# Altium PCB PCB_TIA.PcbDoc
Units mm, origin at the board's own origin, x right, y up, seen from the top; angles counter-clockwise.
Board outline 53.1 x 40 mm, 4 copper layers (Top Layer, Layer 1, Layer 2, Bottom Layer), stack 1.586 mm thick; 14 components, 7 nets, 41 pads, 74 vias.
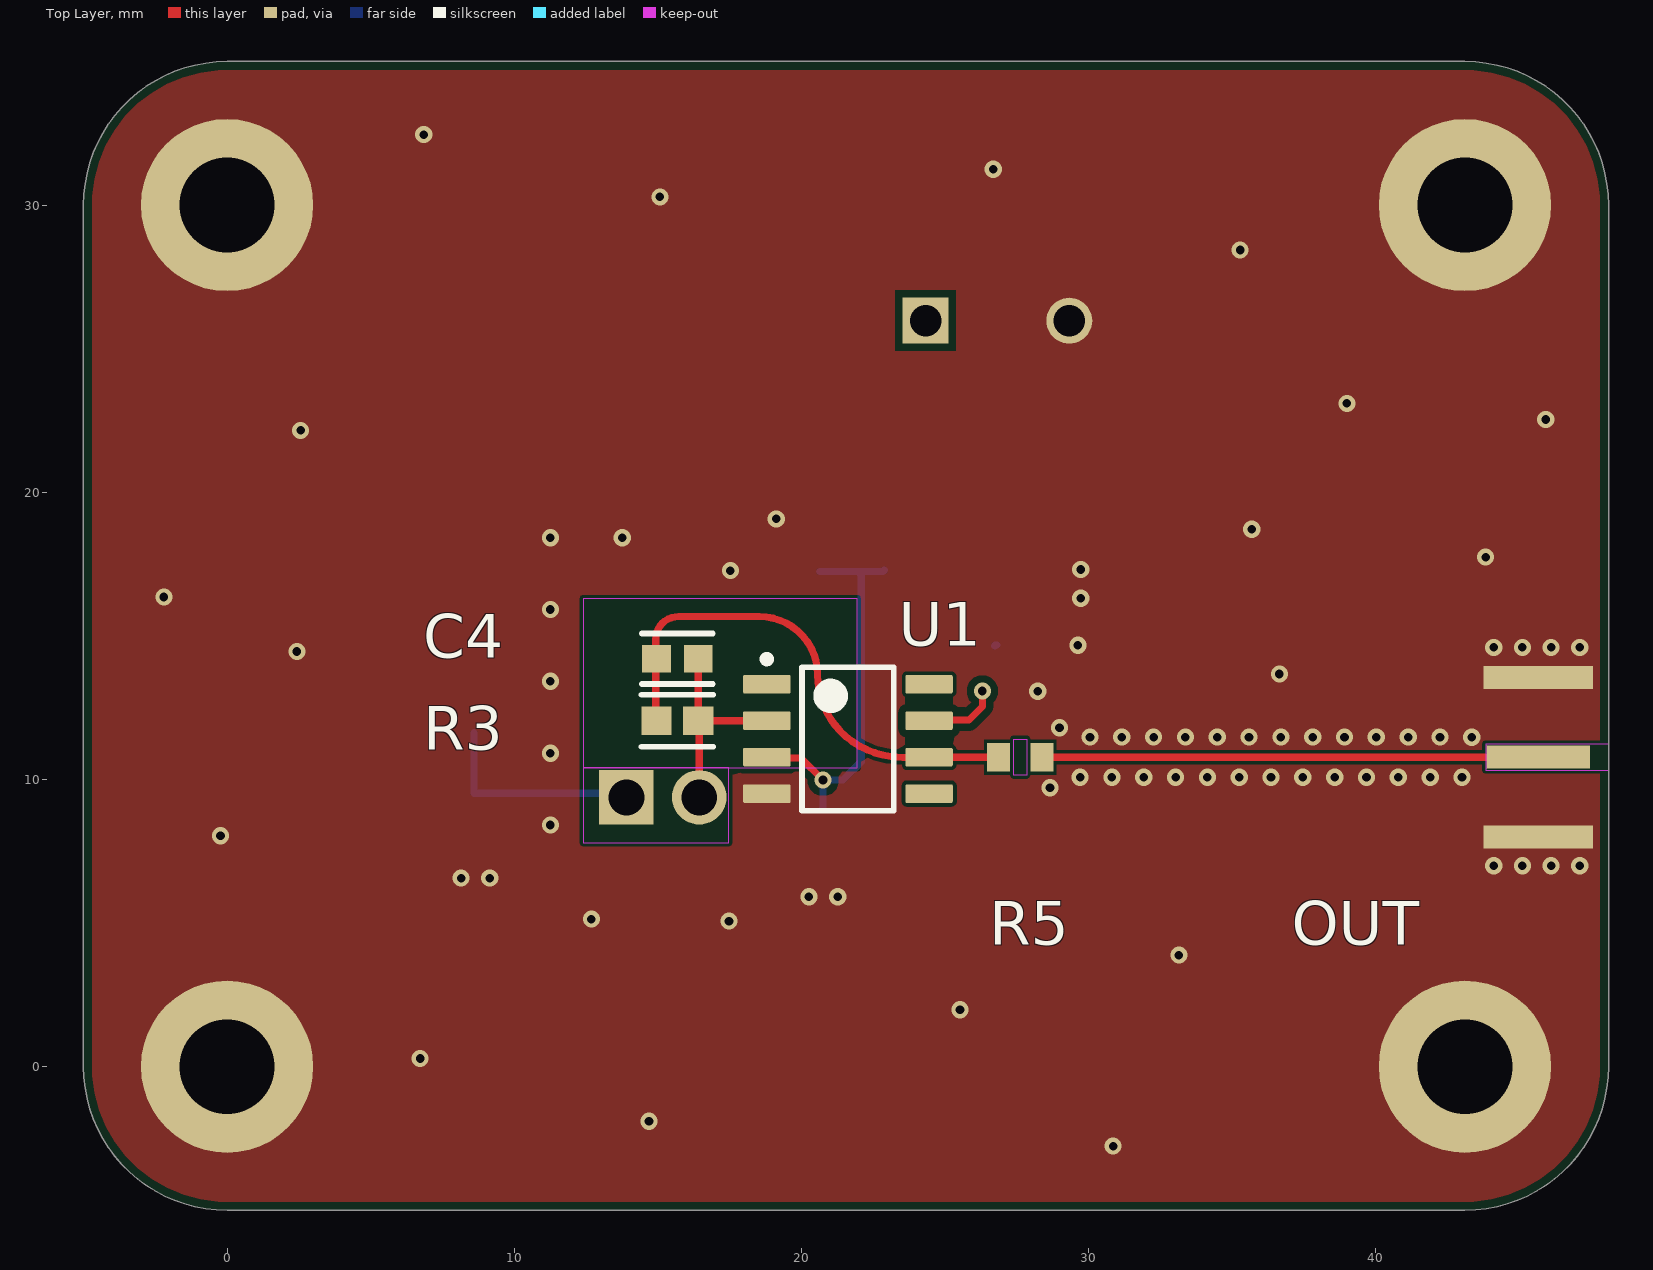
[diagram p0: Top Layer view]
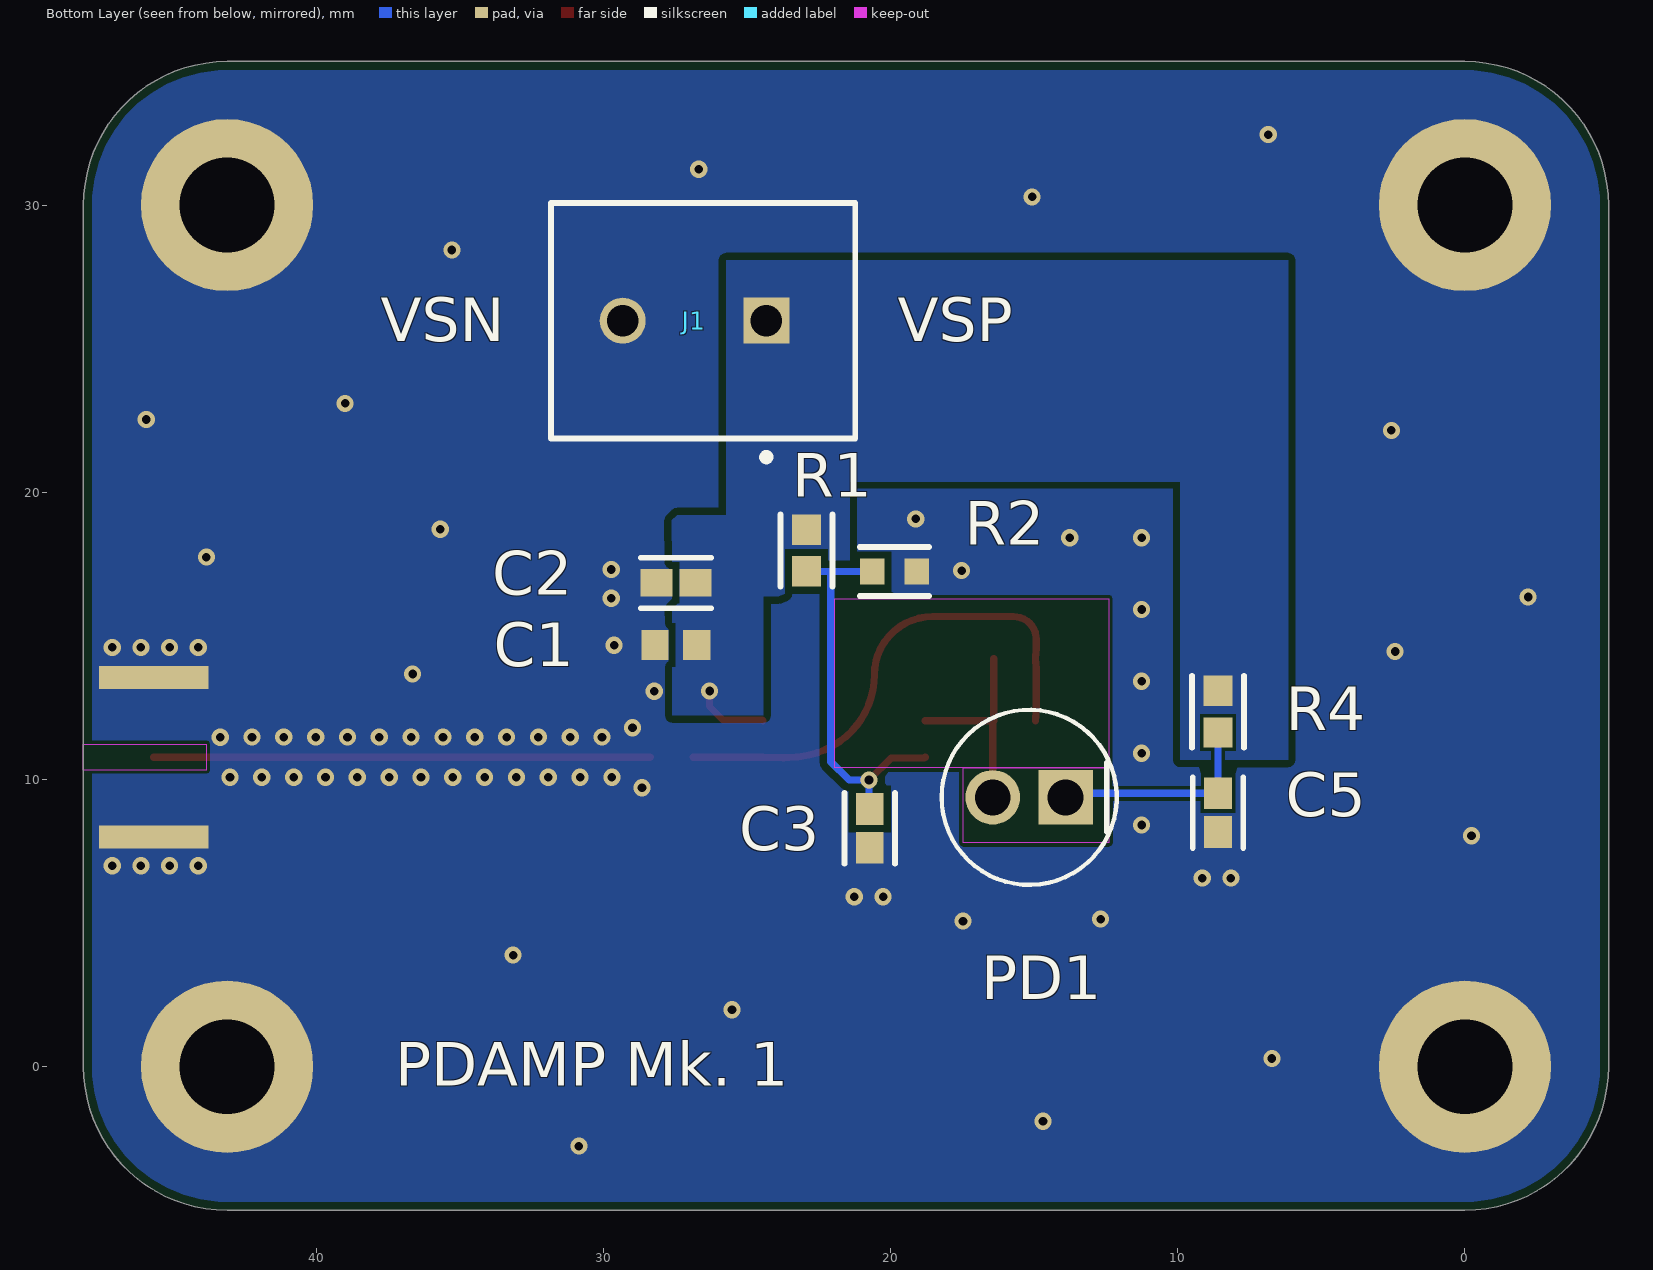
[diagram p1: Bottom Layer view, seen from below]
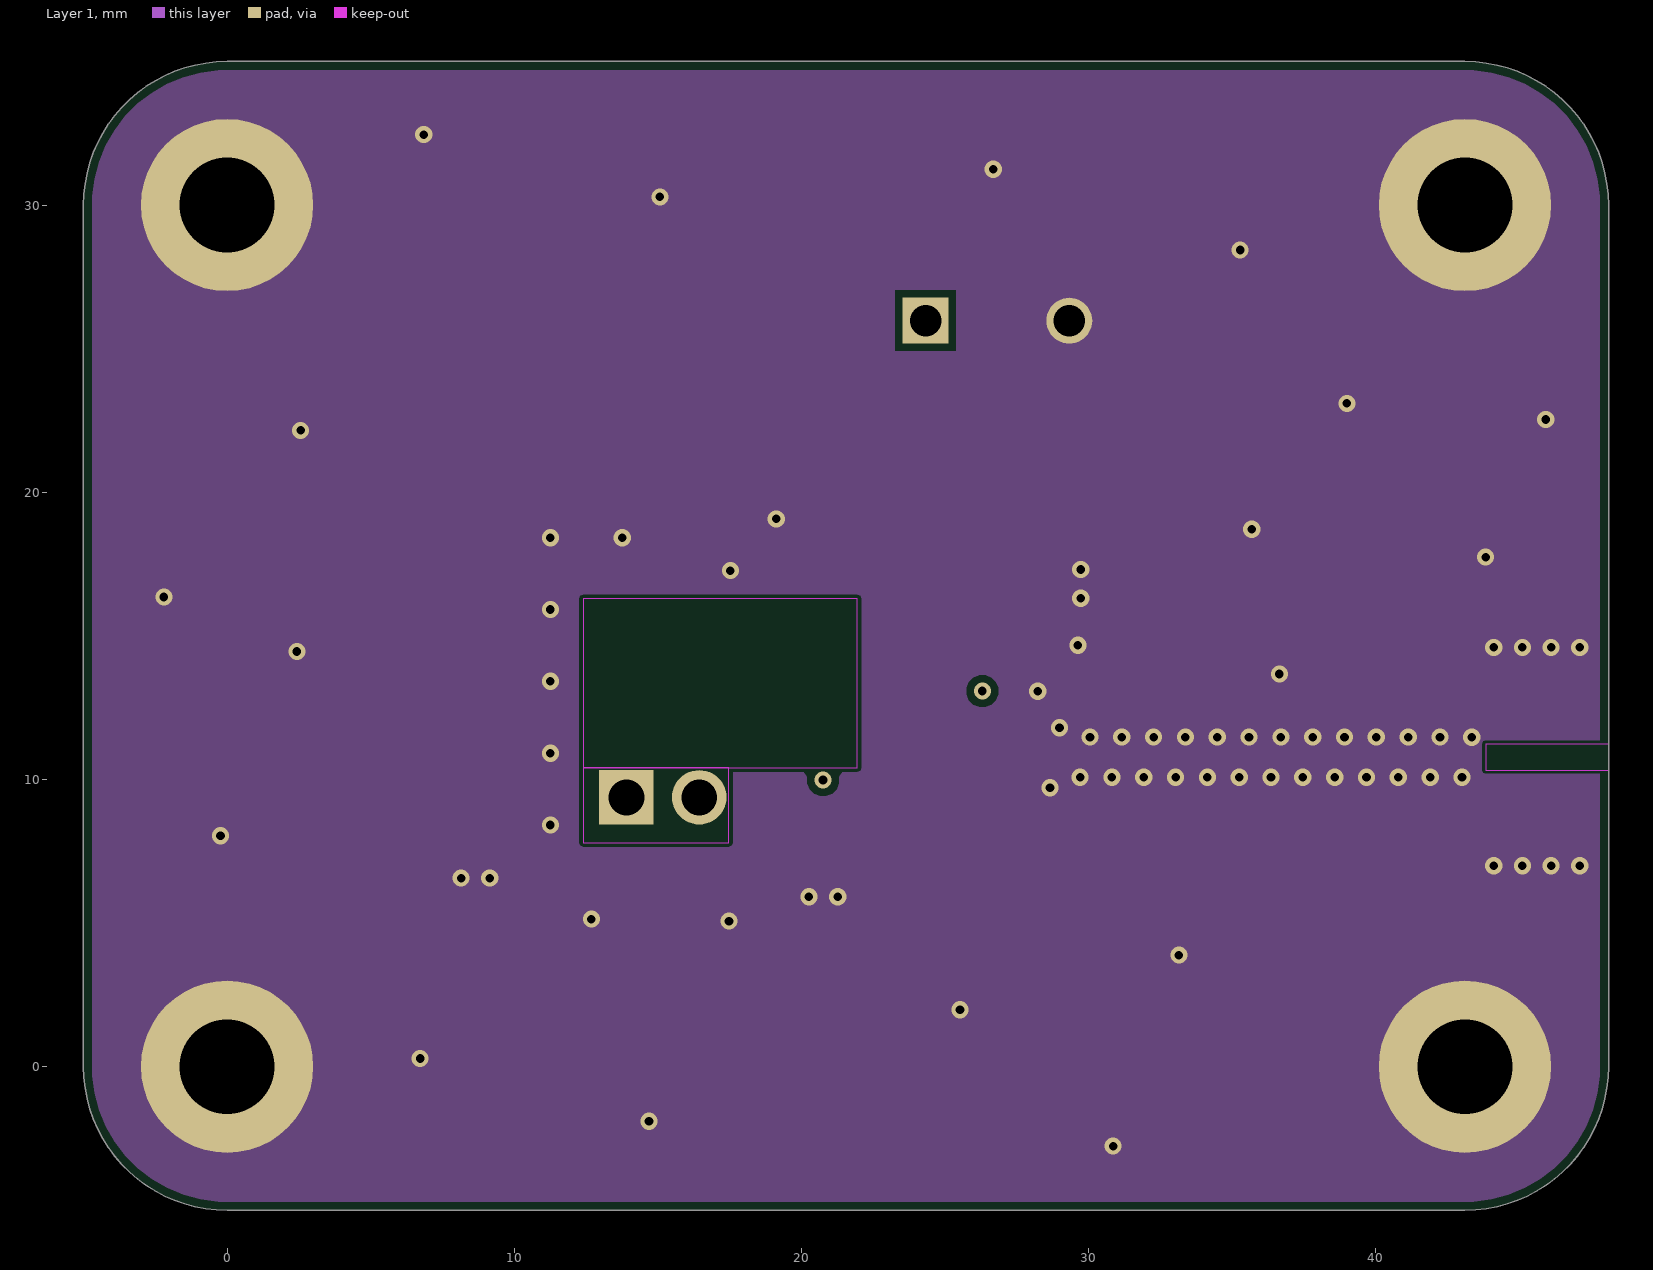
[diagram p2: Layer 1]
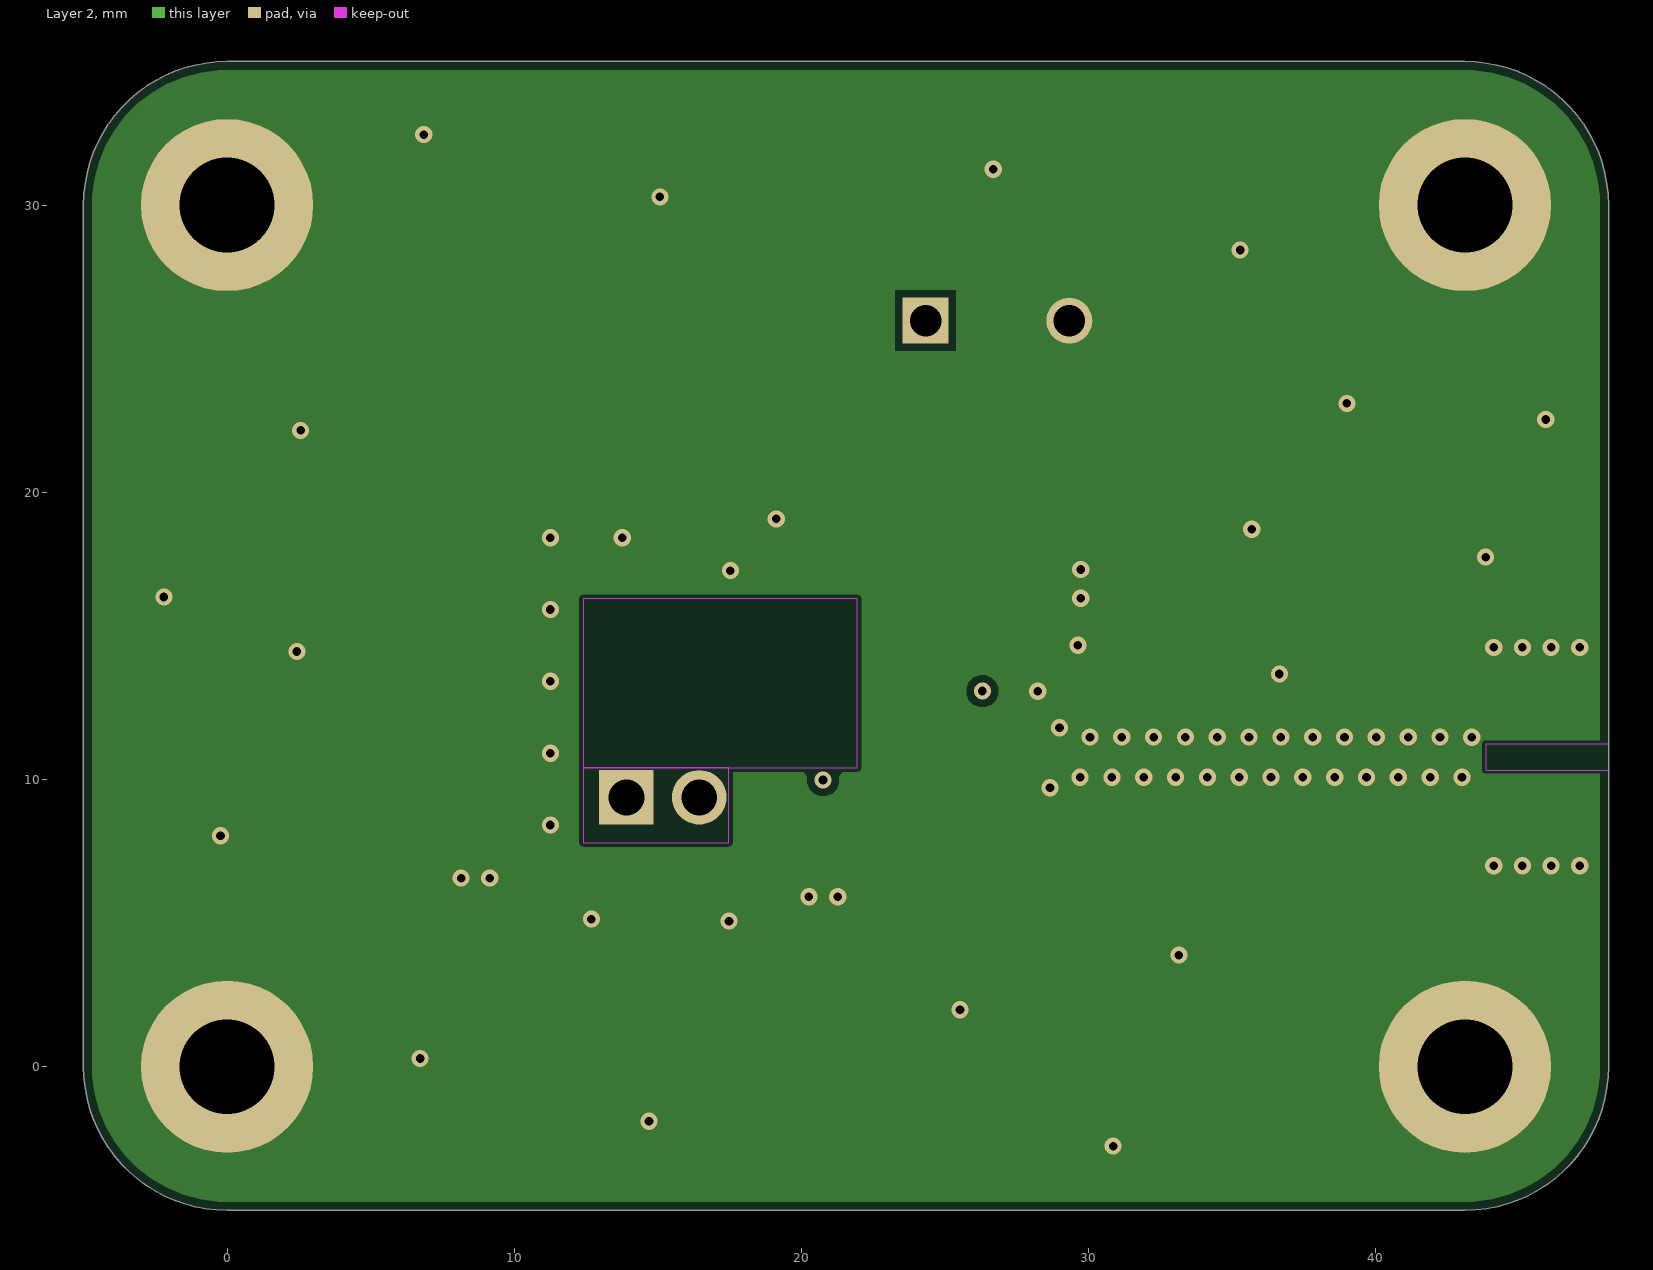
[diagram p3: Layer 2]
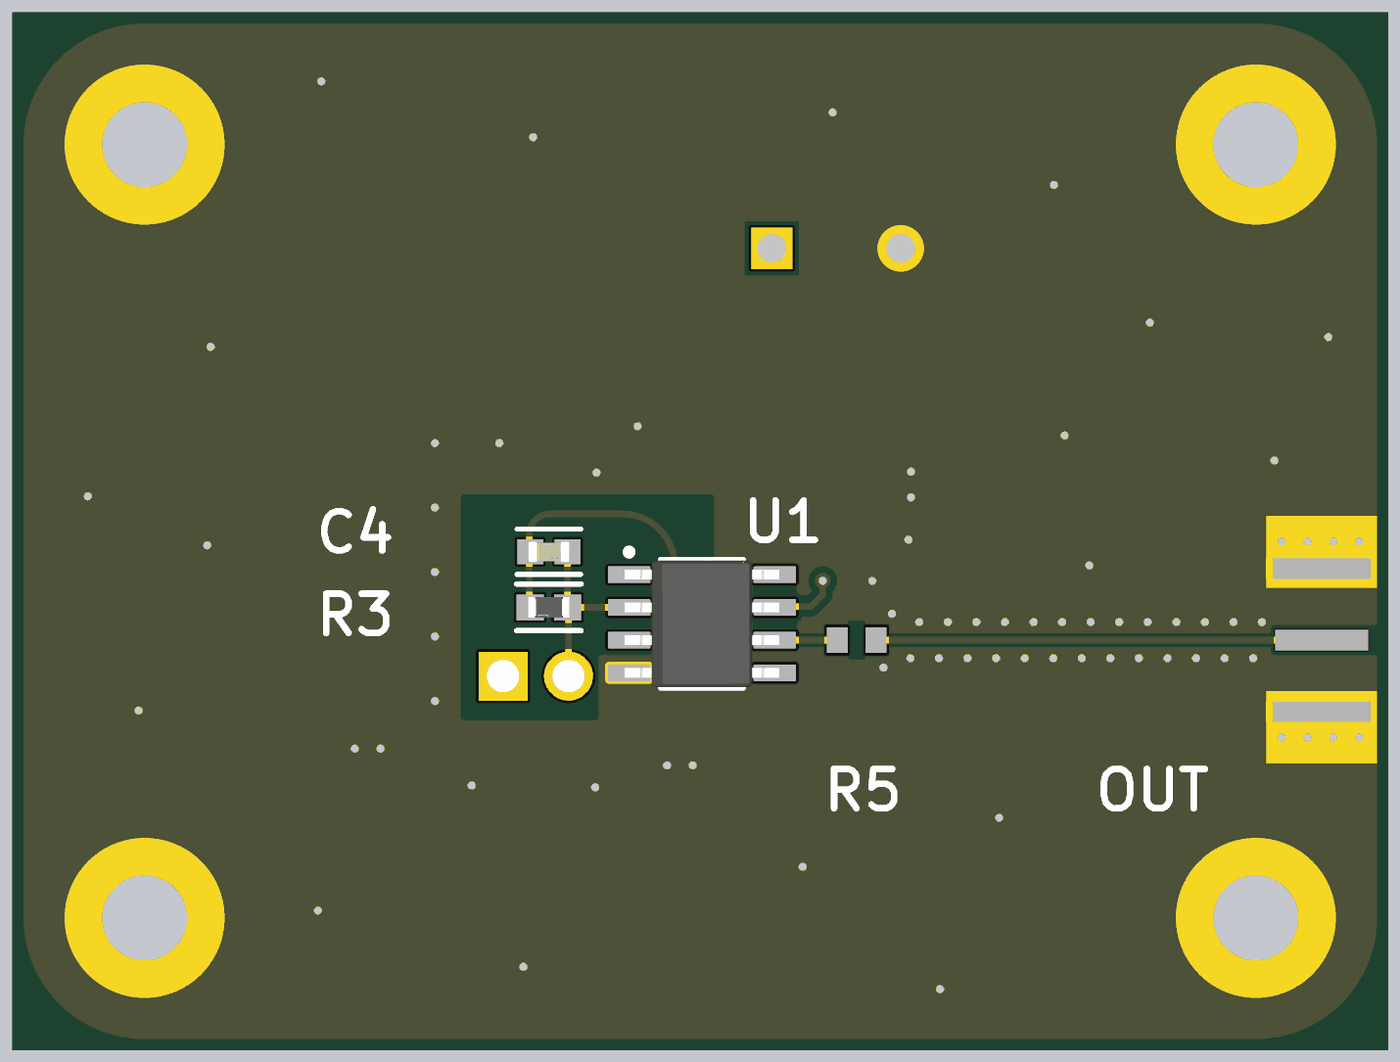
[diagram p4: 3D render of the assembled board from above, using the file's embedded part models]
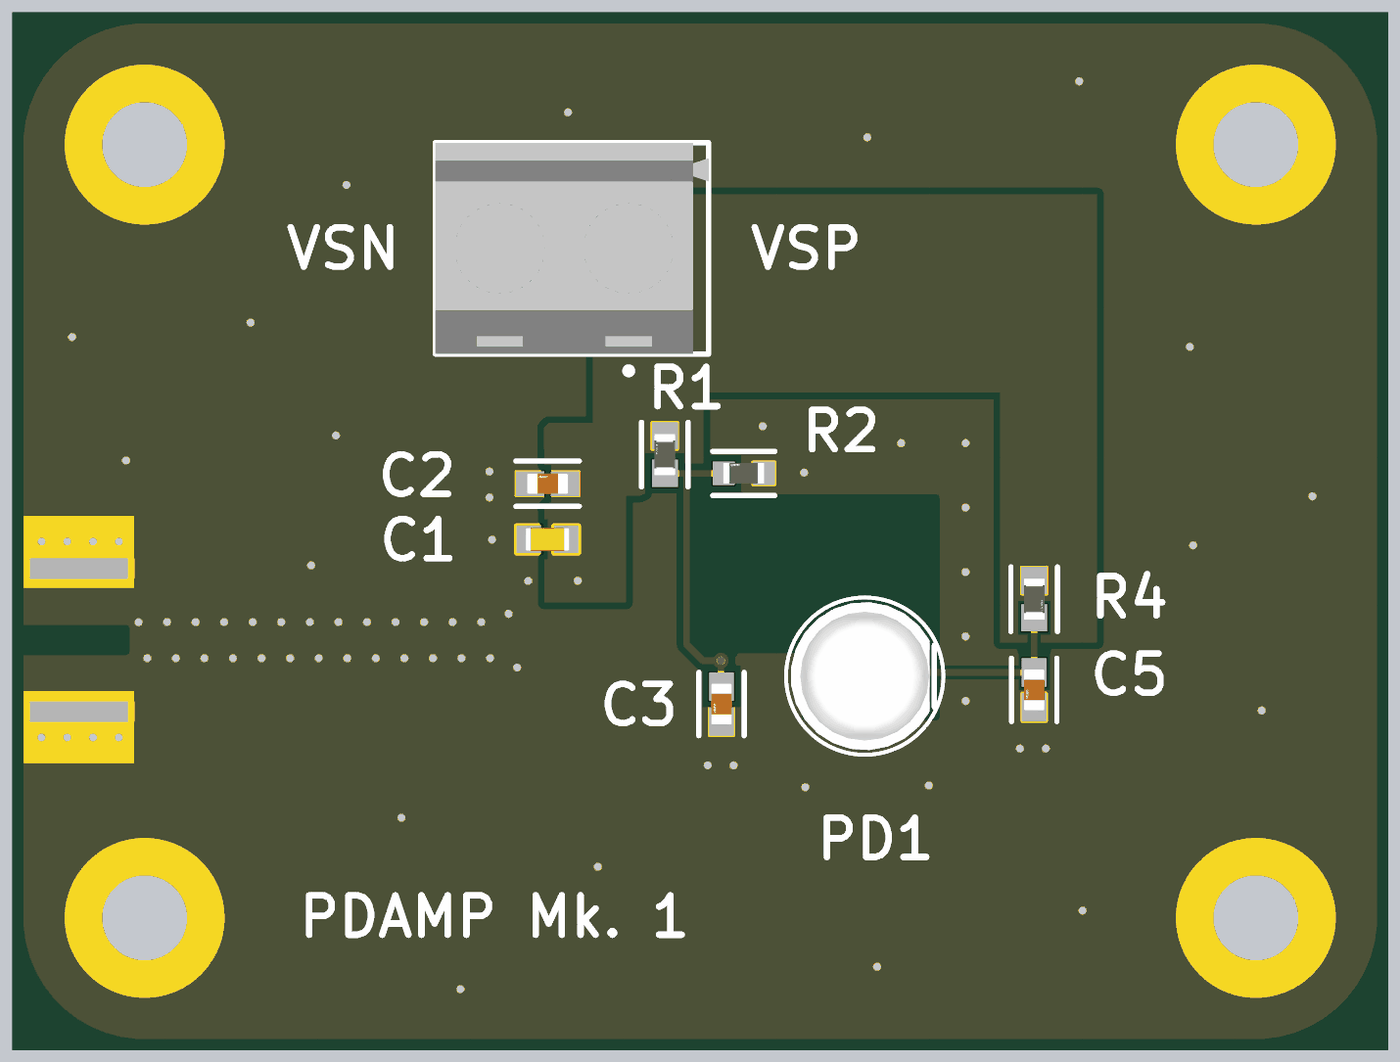
[diagram p5: 3D render of the assembled board from below, using the file's embedded part models]

## Layer stack, top to bottom
Top Solder: solder mask 0.0127, Solder Resist, Dk 3.8
Top Layer: signal copper 0.035
Dielectric 2: prepreg 0.2103, PP-006, Dk 4.58
Layer 1: signal copper 0.0152
Dielectric 1: dielectric 1.065, FR-4, Dk 4.43
Layer 2: signal copper 0.0152
Dielectric 3: prepreg 0.2103, PP-006, Dk 4.58
Bottom Layer: signal copper 0.035
Bottom Solder: solder mask 0.0127, Solder Resist, Dk 3.8

## Board outline
0,-5 cw(c0,0) -5,0 -5,30 cw(c0,30) 0,35 43.1,35 cw(c43.1,30) 48.1,30 48.1,0 cw(c43.1,0) 43.1,-5

## Design rules (kind name [scope] priority, off if disabled: settings)
BoardOutlineClearance [All] p1: gap=0.3 ignorepadtopadclearanceinfootprint=FALSE
Clearance Shield_CLR [InNet('NetR5_2') vs InNet('GND')] p1: gap=0.127 ignorepadtopadclearanceinfootprint=TRUE
Clearance BO_CLR [All vs OnLayer('Board Outline')] p2: gap=1 ignorepadtopadclearanceinfootprint=TRUE
Clearance PWRP_CLR [InNetClass('POWER') vs InNetClass('POWER')] p3: gap=0.254 ignorepadtopadclearanceinfootprint=TRUE except(0.508: Text-Text Text-Hole)
Clearance [All] p4: gap=0.127 ignorepadtopadclearanceinfootprint=TRUE
HoleSize [All] p1: absolutevalues=TRUE maxlimit=4 minlimit=0.025 maxpercent=80.000 minpercent=20.000
MinimumSolderMaskSliver [All] p1: minsoldermaskwidth=0.1
PlaneClearance [All] p1: clearance=1
PolygonConnect [All] p1: connectstyle=Direct reliefconductorwidth=0.254 reliefentries=4 polygonreliefangle="90 Angle" airgapwidth=0.254
RoutingVias [All] p1: holewidth=0.711 width=1.27 viastyle="Through Hole" minholewidth=0.711 minwidth=1.27 maxholewidth=0.711 maxwidth=1.27
SolderMaskExpansion [All] p1: expansion=0.102 istentingtop=FALSE
Width CPWG [InNetClass('TL')] p1: maxlimit=0.251 minlimit=0.179 preferedwidth=0.251 toplayer_minwidth=0.251 bottomlayer_minwidth=0.251 impedanceprofiledriven=TRUE impedanceprofileid={3B33F392-780F-4BF0-AE9E-607B9A927188} impedanceprofilevalue=50.000000 minimp=50.000000 maximp=50.000000 favimp=50.000000
Width [All] p2 off: maxlimit=0.254 minlimit=0.254 preferedwidth=0.254
27 further rules are at their usual default settings.

## Classes and differential pairs
net class POWER: GND VCC VCM
net class TL: NetC4_2 NetR5_2

## Components (designator, comment, footprint, x,y, rotation, side; value= is the part's Value field where it differs from the comment)
C1 "0.1uF" CAPC1608X90X35ML10T15 27.474,14.685 r180 bottom
C2 "1uF" FP-CC0603-DB-IPC_B 27.47,16.844 r180 bottom
C3 "1uF" FP-CC0603-DB-IPC_B 20.725,8.297 r90 bottom
C4 "1pF" FP-C0603C-CF-IPC_B 15.679,14.205 r180 top
C5 "1uF" FP-CC0603-DB-IPC_B 8.598,8.847 r90 bottom
J1 "282836-2" TECO-282836-2_V 26.825,25.973 r0 bottom
OUT "RF2-143-T-17-50-G" SMA_ADAM_TECH 45.651,13.551 r0 top (schematic designator SMA1)
PD1 "BPV10NF" FP-6_544-5185_02-4-MFG 15.171,9.379 r0 bottom
R1 "30K" FP-ERA3A-IPC_B#1 22.925,17.973 r90 bottom
R2 "10K" FP-AC0603-IPC_B 19.862,17.242 r0 bottom
R3 "1K" FP-ERA3A-IPC_B#2 15.679,12.046 r180 top
R4 "30K" FP-ERA3A-IPC_B#1 8.598,12.362 r270 bottom
R5 "49.9" RESC1608X55X25ML10T15 27.617,10.776 r0 top
U1 "LMH6609" D0008A_M 21.617,11.411 r0 top

## Footprints (in the part's own frame and the unit in brackets; to place one, negate y for a bottom-side part, rotate by r counter-clockwise, add the part's x,y. Pads: shape width x height; smd on the part's side, far side on the other; paste and mask are expansions set on the pad)
CAPC1608X90X35ML10T15 [mm] "Chip Capacitor, 2-Leads, Body 1.7x0.9mm, IPC Low Density"
  rect 0.95x1.05 smd: 1(-0.725,0) 2(0.725,0)
  body extent -0.85,-0.45 0.85,0.45, height 0.9
D0008A_M [mm] "SOIC, 8-Leads, Body 5x4mm, Pitch 1.27mm, IPC Low Density"
  rrect15% 1.65x0.65 smd: 1(-2.825,1.905) 2(-2.825,0.635) 3(-2.825,-0.635) 4(-2.825,-1.905) 5(2.825,-1.905) 6(2.825,-0.635) 7(2.825,0.635) 8(2.825,1.905)
  silkscreen extent -2.95,-2.5 1.6,2.9, body extent -3,-2.45 3,2.45, height 1.63
FP-6_544-5185_02-4-MFG [mm]
  rect 1.9x1.9 hole 1.25 paste-2539.97 mask+0.102: 1(-1.27,0)
  round 1.9 hole 1.25 paste-2539.97 mask+0.102: 2(1.27,0)
  silkscreen extent -3.05,-3.05 3.05,3.05, body extent -2.52,-2.87 2.86,2.87, height 12.1
FP-AC0603-IPC_B [mm]
  rect 0.859x0.912 smd paste+0 mask+0.05: 1(-0.777,0) 2(0.777,0)
  silkscreen extent -1.21,-0.86 1.21,0.86, body extent -0.8,-0.4 0.8,0.4, height 0.55
FP-C0603C-CF-IPC_B [mm]
  rect 1.007x0.958 smd paste+0 mask+0.102: 1(-0.726,0) 2(0.726,0)
  silkscreen extent -1.23,-0.88 1.23,0.88, body extent -1.48,-0.73 1.48,0.73, height 0.25
FP-CC0603-DB-IPC_B [mm]
  rect 1.106x0.958 smd paste+0 mask+0.05: 1(-0.676,0) 2(0.676,0)
  silkscreen extent -1.23,-0.88 1.23,0.88, body extent -0.8,-0.4 0.8,0.4, height 0.95
FP-ERA3A-IPC_B#1 [mm]
  rect 1.055x1.006 smd paste+0 mask+0.05: 1(-0.726,0) 2(0.726,0)
  silkscreen extent -1.25,-0.9 1.25,0.9, body extent -0.8,-0.4 0.8,0.4, height 0.55
FP-ERA3A-IPC_B#2 [mm]
  rect 1.055x1.006 smd paste+0 mask+0.102: 1(-0.726,0) 2(0.726,0)
  silkscreen extent -1.25,-0.9 1.25,0.9, body extent -1.5,-0.75 1.5,0.75, height 0.25
RESC1608X55X25ML10T15 [mm] "Chip Resistor, 2-Leads, Body 1.70x0.90mm, IPC Low Density"
  rect 0.8x1 smd: 1(-0.75,0) 2(0.75,0)
  body extent -0.85,-0.45 0.85,0.45, height 0.55
SMA_ADAM_TECH [mm]
  rect 3.6x0.8 smd mask+0.05: 1(0,-2.775)
  rect 3.8x0.8 smd mask+0.254: 2(0,0) 3(0,-5.55)
  rect 3.8x0.8 smd far side mask+0.254: 4(0,0) 5(0,-5.55)
TECO-282836-2_V [mm] "Female Header, Pitch 5mm, 1 x 2 Position, Height 10mm"
  rect 1.6x1.6 hole 1.1: 1(-2.5,0)
  round 1.6 hole 1.1: 2(2.5,0)
  silkscreen extent -5.6,-4.1 5,4.87, body extent -5.6,-4.1 5,4.1, height 10

## Part data
C1 C2 C3 C4 C5: library part CAP0603
J1: library part CMP-1684-00017-1, "Female Header, Pitch 5 mm, 1 x 2 Position, Height 10 mm, Tail Length 3.5 mm, Rohs, Bulk", Color=Green, Current=13.5A, Manufacturer="TE Connectivity", Package Description="Female Header, Pitch 5 mm, 1 x 2 Position, Height 10 mm, Tail Length 3.5 mm", Package Reference=THD, Standard Package=300, Voltage=300V, 3D Model=282836-2.pdf, Category=Connectors,Interconnects, Clamp Material - Plating=Brass-NickelPlated, Contact Material - Plating=Brass-TinPlated, Datasheet URL=http://www.te.com.cn/commerce/DocumentDelivery/DDEController?Action=showdoc&DocId=Catalog+Section%7F1308389_EUROSTYLE_TERMINAL_BLOCKS%7F0607%7Fpdf%7FEnglish%7FENG_CS_1308389_EUROSTYLE_TERMINAL_BLOCKS_0607.pdf%7F282836-2, Dynamic Catalog=BuchananSeries, Family=TerminalBlocks-WiretoBoard, Featured Product=EurostyleTerminalBlockConnectors, Features=Interlocking(Side), Housing Material=Polyamide(PA66),Nylon6/6, Manufacturer URL=http://www.te.com, Mating Orientation=HorizontalwithBoard, Mounting Type=ThroughHole, Number of Levels=1, Other Names="5ULV-02B / A98076", Packaging=Bulk, Pitch="0.197\"(5.00mm)", Positions Per Level=2, Product Training Modules=Wire-to-BoardEurostyleTerminalBlocks, RoHS Information=282836-2StatementofCompliance, Screw Material - Plating=Brass-NickelPlated, Screw Thread=M3, Series=Buchanan, Torque - Screw=0.68Nm(6Lb-In), Wire Gauge=16-30AWG, Wire Termination=Screw-RisingCageClamp
OUT: "Conector:SMA;soclu;mamă;de margine;drept;SMT;pentruPCB;PTFE"
R1 R2 R3 R4 R5: library part RES0603

## Free pads (board coordinates)
  round 6 hole 3.3: M3(0,0) M3(0,30) M3(43.1,0) M3(43.1,30)

## Via types
v1: diameter 0.6, hole 0.3, Top Layer to Bottom Layer, 74 vias

## Nets (pads, with @x,y where several pads share a name; then routed paths per layer and width w, separated by ;. In a path a pad name is that pad's centre, name@x,y a point inside that pad or via, vN(x,y) a via of type N, cw(c..) or ccw(c..) an arc to the next point about the centre after c; other vN are vias at no path point)
GND: C1.1 C2.1 C3.1 C5.1 J1.2 OUT.2 OUT.3 OUT.4 OUT.5 pad.M3 R2.1 U1.4
  other v1: 30.851,-2.766 14.691,-1.896 6.721,0.284 25.521,1.984 33.141,3.884 17.474,5.068 12.684,5.138 20.259,5.917 21.259,5.917 8.149,6.567 9.149,6.567 44.1,7 45.1,7 46.1,7 47.1,7 -0.229,8.044 11.259,8.417 28.654,9.711 29.701,10.075 30.809,10.075 31.917,10.075 33.025,10.075 34.133,10.075 35.241,10.075 36.349,10.075 37.457,10.075 38.565,10.075 39.673,10.075 40.781,10.075 41.889,10.075 42.997,10.075 11.259,10.917 43.334,11.473 30.044,11.477 31.152,11.477 32.26,11.477 33.368,11.477 34.476,11.477 35.584,11.477 36.692,11.477 37.8,11.477 38.908,11.477 40.016,11.477 41.124,11.477 42.232,11.477 28.983,11.798 28.225,13.073 11.259,13.417 36.641,13.674 2.431,14.454 44.1,14.6 45.1,14.6 46.1,14.6 47.1,14.6 29.625,14.673 11.259,15.917 29.725,16.313 -2.199,16.354 17.525,17.273 29.725,17.313 43.821,17.744 11.259,18.417 13.759,18.417 35.681,18.714 19.125,19.073 2.561,22.154 45.911,22.534 38.991,23.094 35.271,28.434 15.071,30.284 26.68,31.25 6.851,32.454
NetC4_1: C4.1 PD1.2 R3.1 U1.2 | length 7.2
  Top Layer w0.254: C4.1 R3.1 R3.1@16.441,12.046 ; PD1.2 R3.1@16.441,12.046 ; U1.2 R3.1@16.441,12.046
NetC4_2: C4.2 R3.2 R5.1 U1.6 | length 18
  Top Layer w0.251: R3.2 14.923,12.423 14.923,13.852 C4.2 14.923,14.558 14.923,14.877 cw(c15.718,14.877) 15.718,15.672 18.538,15.672 cw(c18.538,13.649) 20.561,13.648 ccw(c23.417,13.651) 21.344,11.687 ccw(c23.506,13.786) 23.113,10.798 ccw(c23.506,13.786) 23.297,10.78 23.711,10.753 23.723,10.753 23.743,10.754 U1.6 ; U1.6 R5.1@26.866,10.775
NetC5_2: C5.2 PD1.1 R4.2 | length 8.2
  Bottom Layer w0.254: R4.2 C5.2 13.757,9.523 PD1.1 ccw(c13.438,9.379) PD1.1@13.438,9.842
NetR5_2: OUT.1 R5.2 | length 17.3
  Top Layer w0.251: R5.2 OUT.1
VCC: C1.2 C2.2 J1.1 R1.2 R4.1 U1.7 | length 2.7
  Top Layer w0.254: U1.7 24.467,12.071 25.831,12.071 26.3,12.54 v1(26.3,13.08)
  Bottom Layer w0.254: C1.2@26.725,14.661 C1.2 C1.2@26.794,14.685
VCM: C3.2 R1.1 R2.2 U1.3 | length 13.9
  Top Layer w0.254: U1.3 18.817,10.751 19.979,10.751 v1(20.75,9.98)
  Bottom Layer w0.254: R2.2 21.968,17.242 22.08,17.131 22.08,10.62 21.44,9.98 v1(20.75,9.98) 20.75,8.998 C3.2 ; 21.921,17.242 22.842,17.242 R1.1@22.886,17.287
pads on no net: U1.1 U1.5 U1.8

## Polygon pours and split planes (outlines as drawn)
no net on Top Solder "NONET_L-01_P-001" (solid): 43.5,8.8 47.8,8.8 47.8,6 43.5,6
no net on Top Solder "NONET_L-01_P-001" (solid): 43.5,15.6 47.8,15.6 47.8,12.8 43.5,12.8
VCC on Bottom Layer "NONET_L-01_P-001" (solid, pour order 6): 22.425,28.073 25.725,28.073 25.725,19.2 27.612,19.2 27.592,15.4 27.592,12.23 24.425,12.23 24.425,16.373 21.425,16.373 21.425,20.373 9.912,20.373 9.912,10.689 6.159,10.689 6.159,28.073 21.625,28.073
GND on Bottom Layer "NONET_L-01_P-001" (solid, pour order 8): -5,35 48.1,35 48.1,-5 -5,-5
no net on Bottom Solder "NONET_L-01_P-001" (solid): 43.5,15.6 47.8,15.6 47.8,12.8 43.5,12.8
no net on Bottom Solder "NONET_L-01_P-001" (solid): 43.5,8.8 47.8,8.8 47.8,6 43.5,6
GND on Layer 1 "NONET_L-01_P-001" (solid, pour order 9): -5,35 48.1,35 48.1,-5 -5,-5
GND on Layer 2 "NONET_L-01_P-001" (solid, pour order 10): -5,35 48.1,35 48.1,-5 -5,-5
GND on Top Layer "NONET_L-01_P-001" (solid, pour order 7): -5,35 48.1,35 48.1,-5 -5,-5

## Keep-outs
Top Layer:
  region: 27.39,11.4 27.84,11.4 27.84,10.15 27.39,10.15
Keep-Out Layer:
  rectangle: 43.82,10.33 48.1,11.23
  rectangle: 12.4,10.4 21.95,16.3
  rectangle: 12.4,7.8 17.475,10.4

## Silkscreen, mask and mechanical layers (free items; w line width, h text height)
Bottom Overlay:
  text "VSP" at 19.746,25.254 h1.52
  text "VSN" at 37.746,25.254 h1.52
  text "PDAMP Mk. 1" at 37.245,-0.664 h1.52
Board Outline:
  the board outline again, w0.254